# Altium PCB temp.PcbDoc
Units mil, origin at the board's own origin, x right, y up, seen from the top; angles counter-clockwise.
Board outline 6000 x 4000 mil, 2 copper layers (Top Layer, Bottom Layer); 7 components, 0 nets, 592 pads, 0 vias.
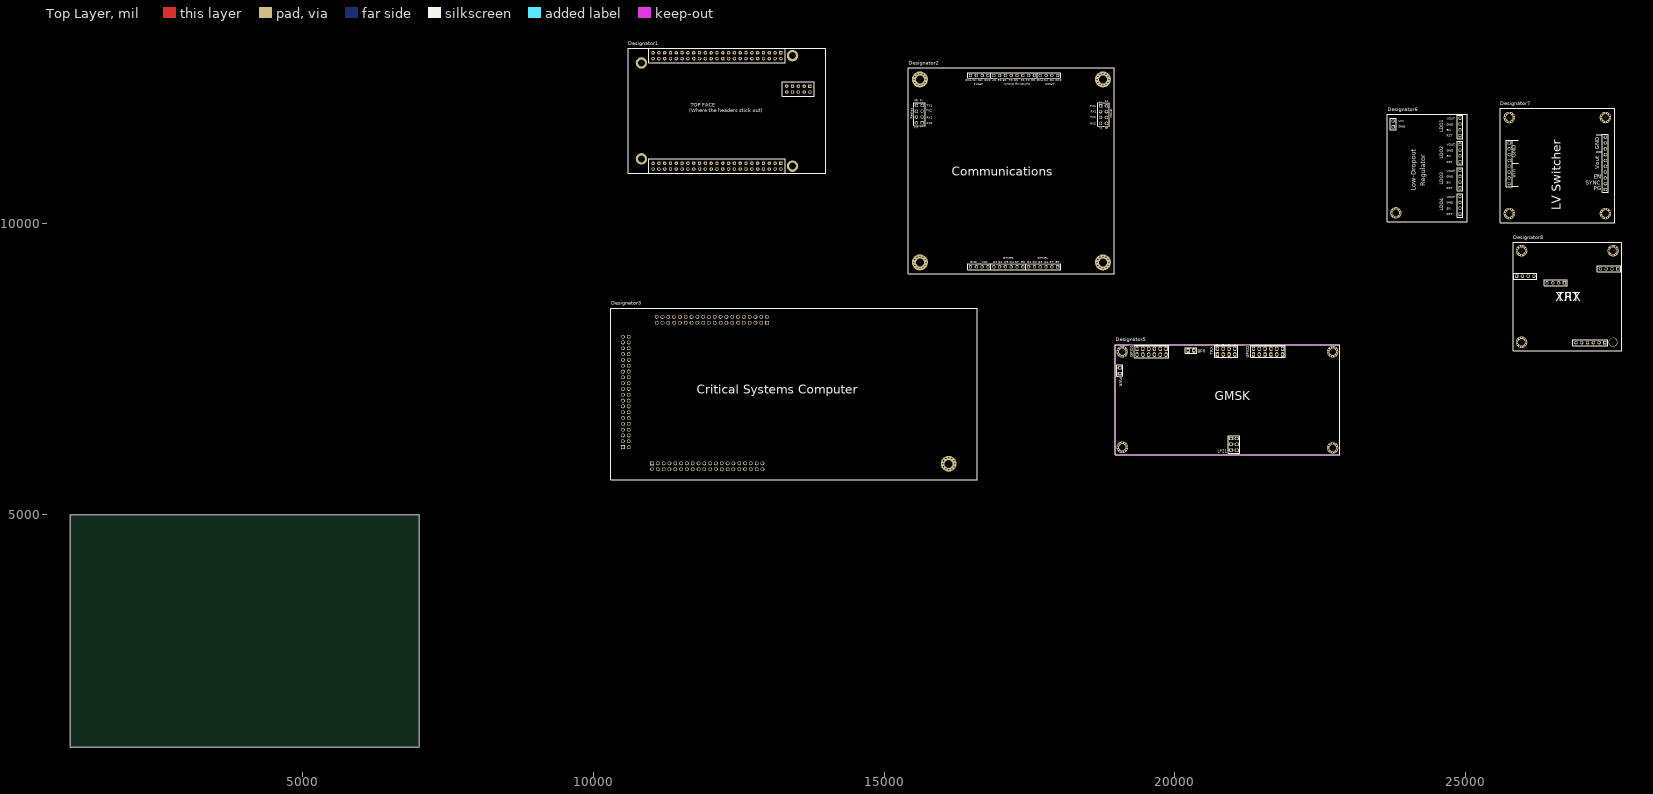
[diagram p0: Top Layer view]
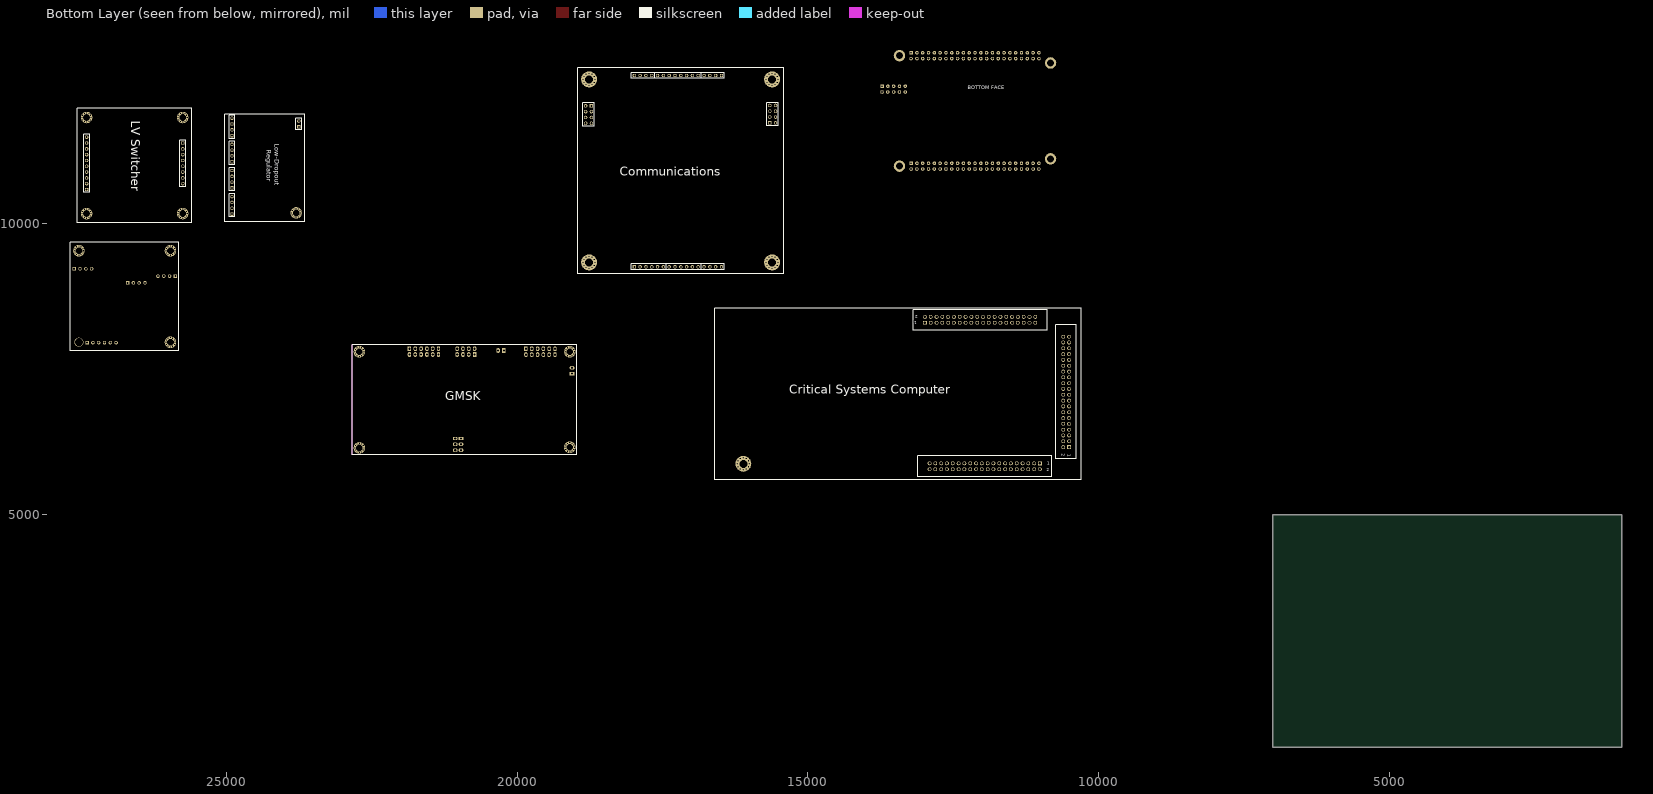
[diagram p1: Bottom Layer view, seen from below]

## Layer stack, top to bottom
Top Layer: signal copper 1.4
Dielectric: dielectric 12.6, FR-4, Dk 4.8
Bottom Layer: signal copper 1.4

## Board outline
1000,1000 7000,1000 7000,5000 1000,5000

## Design rules (kind name [scope] priority, off if disabled: settings)
Clearance [All] p1: gap=10
PolygonConnect [All] p1: connectstyle=Relief reliefconductorwidth=10 reliefentries=4 polygonreliefangle="90 Angle"
RoutingVias [All] p1: holewidth=28 width=50 viastyle="Through Hole" minholewidth=28 minwidth=50 maxholewidth=28 maxwidth=50
SilkscreenOverComponentPads [All] p1: minsilkscreentomaskgap=10
SolderMaskExpansion [All] p1: expansion=4
Width [All] p1: maxlimit=10 minlimit=10 preferedwidth=10
27 further rules are at their usual default settings.

## Components (designator, comment, footprint, x,y, rotation, side; value= is the part's Value field where it differs from the comment)
Designator1 "Comment" Beaglebone 10600,13020 r0 top
Designator2 "Comment" COMMUNICATIONS 15420,9140 r0 top
Designator3 "Comment" CSC 10300,5600 r0 top
Designator5 "Comment" GMSK 18980,6000 r0 top
Designator6 "Comment" LDO 23660,10040 r0 top
Designator7 "Comment" LVSwitcher 25600,10020 r0 top
Designator8 "Comment" TRX_REGULATOR 25840,7840 r0 top

## Footprints (in the part's own frame and the unit in brackets; to place one, negate y for a bottom-side part, rotate by r counter-clockwise, add the part's x,y. Pads: shape width x height; smd on the part's side, far side on the other; paste and mask are expansions set on the pad)
Beaglebone [mil]
  rect 60x60 hole 31.5 mask+2.76: A01(2625,-75) B01(2625,-1975) P01(3125,-650)
  round 60 hole 31.5 mask+2.76: A02(2625,-175) A03(2525,-75) A04(2525,-175) A05(2425,-75) A06(2425,-175) A07(2325,-75) A08(2325,-175) A09(2225,-75) A10(2225,-175) A11(2125,-75) A12(2125,-175) A13(2025,-75) A14(2025,-175) A15(1925,-75) A16(1925,-175) A17(1825,-75) A18(1825,-175) A19(1725,-75) A20(1725,-175) A21(1625,-75) A22(1625,-175) A23(1525,-75) A24(1525,-175) A25(1425,-75) A26(1425,-175) A27(1325,-75) A28(1325,-175) A29(1225,-75) A30(1225,-175) A31(1125,-75) A32(1125,-175) A33(1025,-75) A34(1025,-175) A35(925,-75) A36(925,-175) A37(825,-75) A38(825,-175) A39(725,-75) A40(725,-175) A41(625,-75) A42(625,-175) A43(525,-75) A44(525,-175) A45(425,-75) A46(425,-175) B02(2625,-2075) B03(2525,-1975) B04(2525,-2075) B05(2425,-1975) B06(2425,-2075) B07(2325,-1975) B08(2325,-2075) B09(2225,-1975) B10(2225,-2075) B11(2125,-1975) B12(2125,-2075) B13(2025,-1975) B14(2025,-2075) B15(1925,-1975) B16(1925,-2075) B17(1825,-1975) B18(1825,-2075) B19(1725,-1975) B20(1725,-2075) B21(1625,-1975) B22(1625,-2075) B23(1525,-1975) B24(1525,-2075) B25(1425,-1975) B26(1425,-2075) B27(1325,-1975) B28(1325,-2075) B29(1225,-1975) B30(1225,-2075) B31(1125,-1975) B32(1125,-2075) B33(1025,-1975) B34(1025,-2075) B35(925,-1975) B36(925,-2075) B37(825,-1975) B38(825,-2075) B39(725,-1975) B40(725,-2075) B41(625,-1975) B42(625,-2075) B43(525,-1975) B44(525,-2075) B45(425,-1975) B46(425,-2075) P02(3125,-750) P03(3025,-650) P04(3025,-750) P05(2925,-650) P06(2925,-750) P07(2825,-650) P08(2825,-750) P09(2725,-650) P10(2725,-750)
  round 196.85 hole 122.05 mask+2.76: M1(225,-250) M2(225,-1900) M3(2825,-125) M4(2825,-2025)
  silkscreen extent 0,-2150 3400,0
COMMUNICATIONS [mm] "Communications"
  round 1.5 hole 0.9: AFSK1_M0(32.192,86.733) AFSK1_M1(29.652,86.733) AFSK1_RXD(34.732,86.733) AFSK2_RXD(65.212,86.733) AFSK_M0(62.672,86.733) AFSK_M1(60.132,86.733) AFSK_TXD(57.592,86.733) DTMF1_Q1(52.512,3.113) DTMF1_Q2(55.052,3.113) DTMF1_Q3(57.592,3.113) DTMF1_Q4(60.132,3.113) DTMF1_ST(62.672,3.113) DTMF2_ES(49.972,3.113) DTMF2_Q1(37.272,3.113) DTMF2_Q2(39.812,3.113) DTMF2_Q3(42.352,3.113) DTMF2_Q4(44.892,3.113) DTMF2_ST(47.432,3.113) GMSK_RX1(83.952,70.923) GMSK_RX2(83.952,65.843) GMSK_TX2(83.952,68.383) GND(3.462,66.013) GND(3.462,68.553) GND(3.462,71.093) GND(3.462,73.633) GND(27.112,3.113) GND(29.652,3.113) GND(86.492,65.843) GND(86.492,68.383) GND(86.492,70.923) GND(86.492,73.463) RX1(6.002,68.553) S0(55.052,86.733) S1(52.512,86.733) S2(49.972,86.733) S3(47.432,86.733) S4(44.892,86.733) S5(42.352,86.733) S6(39.812,86.733) S7(37.272,86.733) TX1(6.002,73.633) TX2(6.002,71.093) VCC(32.192,3.113) VCC(34.732,3.113)
  rect 1.5x1.5 hole 0.9: AFSK1_TXD(27.112,86.733) DTMF1_ES(65.212,3.113) GMSK_TX1(83.952,73.463) RX2(6.002,66.013)
  round 1 hole 0.3: GND(2.377,5.013) GND(2.377,85.013) GND(2.729,3.701) GND(2.729,6.325) GND(2.729,83.701) GND(2.729,86.325) GND(3.69,7.286) GND(3.69,87.286) GND(3.69,2.74) GND(3.69,82.74) GND(5.002,2.388) GND(5.002,7.638) GND(5.002,82.388) GND(5.002,87.638) GND(6.314,2.74) GND(6.314,7.286) GND(6.314,82.74) GND(6.314,87.286) GND(7.275,3.701) GND(7.275,83.701) GND(7.275,6.325) GND(7.275,86.325) GND(7.627,5.013) GND(7.627,85.013) GND(82.375,85) GND(82.377,5.013) GND(82.727,83.688) GND(82.727,86.312) GND(82.729,3.701) GND(82.729,6.325) GND(83.688,87.273) GND(83.688,82.727) GND(83.69,7.286) GND(83.69,2.74) GND(85,82.375) GND(85,87.625) GND(85.002,2.388) GND(85.002,7.638) GND(86.312,82.727) GND(86.312,87.273) GND(86.314,2.74) GND(86.314,7.286) GND(87.273,83.688) GND(87.273,86.312) GND(87.275,3.701) GND(87.275,6.325) GND(87.625,85) GND(87.627,5.013)
  round 7 hole 3.5: GND(5.002,5.013) GND(5.002,85.013) GND(85,85) GND(85.002,5.013)
  silkscreen extent 0,0.01 90,90.01
CSC [mm] "Critical Systems Computer"
  rect 1.65x1.65 hole 1.1: C1_1(68.259,68.588) C2_1(5.267,14.232) C3_1(17.967,7.12)
  round 1.65 hole 1.1: C1_2(68.259,71.128) C1_3(65.719,68.588) C1_4(65.719,71.128) C1_5(63.179,68.588) C1_6(63.179,71.128) C1_7(60.639,68.588) C1_8(60.639,71.128) C1_9(58.099,68.588) C1_10(58.099,71.128) C1_11(55.559,68.588) C1_12(55.559,71.128) C1_13(53.019,68.588) C1_14(53.019,71.128) C1_15(50.479,68.588) C1_16(50.479,71.128) C1_17(47.939,68.588) C1_18(47.939,71.128) C1_19(45.399,68.588) C1_20(45.399,71.128) C1_21(42.859,68.588) C1_22(42.859,71.128) C1_23(40.319,68.588) C1_24(40.319,71.128) C1_25(37.779,68.588) C1_26(37.779,71.128) C1_27(35.239,68.588) C1_28(35.239,71.128) C1_29(32.699,68.588) C1_30(32.699,71.128) C1_31(30.159,68.588) C1_32(30.159,71.128) C1_33(27.619,68.588) C1_34(27.619,71.128) C1_35(25.079,68.588) C1_36(25.079,71.128) C1_37(22.539,68.588) C1_38(22.539,71.128) C1_39(19.999,68.588) C1_40(19.999,71.128) C2_2(7.807,14.232) C2_3(5.267,16.772) C2_4(7.807,16.772) C2_5(5.267,19.312) C2_6(7.807,19.312) C2_7(5.267,21.852) C2_8(7.807,21.852) C2_9(5.267,24.392) C2_10(7.807,24.392) C2_11(5.267,26.932) C2_12(7.807,26.932) C2_13(5.267,29.472) C2_14(7.807,29.472) C2_15(5.267,32.012) C2_16(7.807,32.012) C2_17(5.267,34.552) C2_18(7.807,34.552) C2_19(5.267,37.092) C2_20(7.807,37.092) C2_21(5.267,39.632) C2_22(7.807,39.632) C2_23(5.267,42.172) C2_24(7.807,42.172) C2_25(5.267,44.712) C2_26(7.807,44.712) C2_27(5.267,47.252) C2_28(7.807,47.252) C2_29(5.267,49.792) C2_30(7.807,49.792) C2_31(5.267,52.332) C2_32(7.807,52.332) C2_33(5.267,54.872) C2_34(7.807,54.872) C2_35(5.267,57.412) C2_36(7.807,57.412) C2_37(5.267,59.952) C2_38(7.807,59.952) C2_39(5.267,62.492) C2_40(7.807,62.492) C3_2(17.967,4.58) C3_3(20.507,7.12) C3_4(20.507,4.58) C3_5(23.047,7.12) C3_6(23.047,4.58) C3_7(25.587,7.12) C3_8(25.587,4.58) C3_9(28.127,7.12) C3_10(28.127,4.58) C3_11(30.667,7.12) C3_12(30.667,4.58) C3_13(33.207,7.12) C3_14(33.207,4.58) C3_15(35.747,7.12) C3_16(35.747,4.58) C3_17(38.287,7.12) C3_18(38.287,4.58) C3_19(40.827,7.12) C3_20(40.827,4.58) C3_21(43.367,7.12) C3_22(43.367,4.58) C3_23(45.907,7.12) C3_24(45.907,4.58) C3_25(48.447,7.12) C3_26(48.447,4.58) C3_27(50.987,7.12) C3_28(50.987,4.58) C3_29(53.527,7.12) C3_30(53.527,4.58) C3_31(56.067,7.12) C3_32(56.067,4.58) C3_33(58.607,7.12) C3_34(58.607,4.58) C3_35(61.147,7.12) C3_36(61.147,4.58) C3_37(63.687,7.12) C3_38(63.687,4.58) C3_39(66.227,7.12) C3_40(66.227,4.58)
  round 1 hole 0.3: GND(145,6.95) GND(145.352,5.638) GND(145.352,8.262) GND(146.313,9.223) GND(146.313,4.677) GND(147.625,4.325) GND(147.625,9.575) GND(148.937,4.677) GND(148.937,9.223) GND(149.898,5.638) GND(149.898,8.262) GND(150.25,6.95)
  round 7 hole 3.5: GND(147.625,6.95)
  silkscreen extent 0,0 160,75
GMSK [mm] "Foot print of GMSK for the flatsat board"
  rect 1.5x2.1 hole 1: 1A(22.15,47.03) 1B(73.05,47.08) 1C(44.59,44.54) 2C(31.77,46.29)
  rect 2.1x1.5 hole 1: 1C(50.53,7.82) 8C(1.97,36.2)
  oval 1.5x2.1 hole 1: 2A(22.15,44.49) 2B(73.05,44.54) 3A(19.61,47.03) 3B(70.51,47.08) 3C(47.13,44.54) 4A(19.61,44.49) 4B(70.51,44.54) 5A(17.07,47.03) 5B(67.97,47.08) 5C(49.67,44.54) 6A(17.07,44.49) 6B(67.97,44.54) 7A(14.53,47.03) 7B(65.43,47.08) 7C(52.21,44.54) 8A(14.53,44.49) 8B(65.43,44.54) 8C(44.59,47.08) 8C(47.13,47.08) 8C(49.67,47.08) 8C(52.21,47.08) 8C(60.35,47.08) 9A(11.99,47.03) 9B(62.89,47.08) 10A(11.99,44.49) 10B(62.89,44.54) 11A(9.45,47.03) 12A(9.45,44.49) 12C(60.35,44.54) ""(34.31,46.29)
  oval 2.1x1.5 hole 1: 2C(1.97,38.74) 3(50.53,5.28) 3C(50.53,2.74) 4(53.07,5.28) 5C(53.07,2.74) 7C(53.07,7.82)
  round 5 hole 3: 8C(2.97,45.74) 8C(3,4) 8C(94.97,3.74) 8C(94.97,45.74)
  round 1 hole 0.3: GND(0.97,45.74) GND(1,4) GND(1.238,44.74) GND(1.238,46.74) GND(1.268,3) GND(1.268,5) GND(1.97,44.008) GND(1.97,47.472) GND(2,2.268) GND(2,5.732) GND(2.97,43.74) GND(2.97,47.74) GND(3,2) GND(3,6) GND(3.97,44.008) GND(3.97,47.472) GND(4,2.268) GND(4,5.732) GND(4.702,44.74) GND(4.702,46.74) GND(4.732,3) GND(4.732,5) GND(4.97,45.74) GND(5,4) GND(92.97,3.74) GND(92.97,45.74) GND(93.238,2.74) GND(93.238,4.74) GND(93.238,44.74) GND(93.238,46.74) GND(93.97,2.008) GND(93.97,5.472) GND(93.97,44.008) GND(93.97,47.472) GND(94.97,1.74) GND(94.97,5.74) GND(94.97,43.74) GND(94.97,47.74) GND(95.97,2.008) GND(95.97,5.472) GND(95.97,44.008) GND(95.97,47.472) GND(96.702,2.74) GND(96.702,4.74) GND(96.702,44.74) GND(96.702,46.74) GND(96.97,3.74) GND(96.97,45.74)
  Top Layer lines w0.3: 50.03,2.24 50.53,2.74
  Keep-Out Layer lines w0.254: -0.03,0.74 -0.03,48.74 97.97,48.74 97.97,0.74 -0.03,0.74
  silkscreen extent -0.03,0.74 97.97,48.94, body extent 0.8,1.57 74.23,48.26, height 7.01
LDO [mm] "Low-dropout Regulator"
  round 1.5 hole 0.9: EN1(31.75,40.132) EN2(31.75,28.702) EN3(31.75,17.272) EN4(31.75,5.842) GND(31.75,8.382) GND(31.75,19.812) GND(31.75,31.242) GND(31.75,42.672) VIN(2.54,43.942) VOUT1(31.75,45.212) VOUT2(31.75,33.782) VOUT3(31.75,22.352) VOUT4(31.75,10.922)
  round 1 hole 0.3: GND(1.683,3.81) GND(1.951,2.81) GND(1.951,4.81) GND(2.683,2.078) GND(2.683,5.542) GND(3.683,1.81) GND(3.683,5.81) GND(4.683,2.078) GND(4.683,5.542) GND(5.415,2.81) GND(5.415,4.81) GND(5.683,3.81)
  rect 1.5x1.5 hole 0.9: GND(2.54,41.402) RESET1(31.75,37.592) RESET2(31.75,26.162) RESET3(31.75,14.732) RESET4(31.75,3.302)
  round 5 hole 3: GND(3.683,3.81)
  silkscreen extent 0,0 34.9,46.9
LVSwitcher [mm] "Low-Voltage Switching Regulator"
  round 1.5 hole 0.9: EN(46,19.615) GND(3.975,27.235) GND(3.975,29.775) GND(3.975,32.315) GND(46,32.315) GND(46,34.855) GND(46,37.395) SYNC(46,17.075) Vin(3.975,17.075) Vin(3.975,19.615) Vin(3.975,22.155) Vin(3.975,24.695) Vout(46,22.155) Vout(46,24.695) Vout(46,27.235) Vout(46,29.775)
  round 1 hole 0.3: GND(2,4) GND(2,46) GND(2.268,3) GND(2.268,5) GND(2.268,45) GND(2.268,47) GND(3,2.268) GND(3,5.732) GND(3,44.268) GND(3,47.732) GND(4,2) GND(4,6) GND(4,44) GND(4,48) GND(5,2.268) GND(5,5.732) GND(5,44.268) GND(5,47.732) GND(5.732,3) GND(5.732,5) GND(5.732,45) GND(5.732,47) GND(6,4) GND(6,46) GND(44,4) GND(44,46) GND(44.268,3) GND(44.268,5) GND(44.268,45) GND(44.268,47) GND(45,2.268) GND(45,5.732) GND(45,44.268) GND(45,47.732) GND(46,2) GND(46,6) GND(46,44) GND(46,48) GND(47,2.268) GND(47,5.732) GND(47,44.268) GND(47,47.732) GND(47.732,3) GND(47.732,5) GND(47.732,45) GND(47.732,47) GND(48,4) GND(48,46)
  rect 1.5x1.5 hole 0.9: GND(3.975,34.855) PG(46,14.535)
  round 5 hole 3: GND(4,4) GND(4,46) GND(46,4) GND(46,46)
  silkscreen extent 0,0 50,50
TRX_REGULATOR [mm]
  round 1.5 hole 0.9: 1(27.018,2.962) 1(29.558,2.962) 1(32.098,2.962) 2(3.65,32.045) 2(34.638,2.962) 2(37.178,2.962) 2(42.791,35.27) 3(19.474,29.149) 4(16.934,29.149) 5(37.711,35.27) 5(40.251,35.27) 6(6.19,32.045) 6(8.73,32.045) 7(14.394,29.149)
  rect 1.5x1.5 hole 0.9: 2(1.11,32.045) 2(22.014,29.149) 2(39.718,2.962) 2(45.331,35.27)
  round 4 hole 3.5: 4(43.291,3.161)
  round 5 hole 3: 8C(3.291,3.161) 8C(3.291,43.161) 8C(43.291,43.161)
  round 1 hole 0.3: GND(1.291,3.161) GND(1.291,43.161) GND(1.559,2.161) GND(1.559,4.161) GND(1.559,42.161) GND(1.559,44.161) GND(2.291,1.429) GND(2.291,4.893) GND(2.291,41.429) GND(2.291,44.893) GND(3.291,1.161) GND(3.291,5.161) GND(3.291,41.161) GND(3.291,45.161) GND(4.291,1.429) GND(4.291,4.893) GND(4.291,41.429) GND(4.291,44.893) GND(5.023,2.161) GND(5.023,4.161) GND(5.023,42.161) GND(5.023,44.161) GND(5.291,3.161) GND(5.291,43.161) GND(41.291,43.161) GND(41.559,42.161) GND(41.559,44.161) GND(42.291,41.429) GND(42.291,44.893) GND(43.291,41.161) GND(43.291,45.161) GND(44.291,41.429) GND(44.291,44.893) GND(45.023,42.161) GND(45.023,44.161) GND(45.291,43.161)
  silkscreen extent -0.41,-0.54 46.98,46.86

## Nets (pads, with @x,y where several pads share a name; then routed paths per layer and width w, separated by ;. In a path a pad name is that pad's centre, name@x,y a point inside that pad or via, vN(x,y) a via of type N, cw(c..) or ccw(c..) an arc to the next point about the centre after c; other vN are vias at no path point)
pads on no net: Designator1.A01 Designator1.A02 Designator1.A03 Designator1.A04 Designator1.A05 Designator1.A06 Designator1.A07 Designator1.A08 Designator1.A09 Designator1.A10 Designator1.A11 Designator1.A12 Designator1.A13 Designator1.A14 Designator1.A15 Designator1.A16 Designator1.A17 Designator1.A18 Designator1.A19 Designator1.A20 Designator1.A21 Designator1.A22 Designator1.A23 Designator1.A24 Designator1.A25 Designator1.A26 Designator1.A27 Designator1.A28 Designator1.A29 Designator1.A30 Designator1.A31 Designator1.A32 Designator1.A33 Designator1.A34 Designator1.A35 Designator1.A36 Designator1.A37 Designator1.A38 Designator1.A39 Designator1.A40 Designator1.A41 Designator1.A42 Designator1.A43 Designator1.A44 Designator1.A45 Designator1.A46 Designator1.B01 Designator1.B02 Designator1.B03 Designator1.B04 Designator1.B05 Designator1.B06 Designator1.B07 Designator1.B08 Designator1.B09 Designator1.B10 Designator1.B11 Designator1.B12 Designator1.B13 Designator1.B14 Designator1.B15 Designator1.B16 Designator1.B17 Designator1.B18 Designator1.B19 Designator1.B20 Designator1.B21 Designator1.B22 Designator1.B23 Designator1.B24 Designator1.B25 Designator1.B26 Designator1.B27 Designator1.B28 Designator1.B29 Designator1.B30 Designator1.B31 Designator1.B32 Designator1.B33 Designator1.B34 Designator1.B35 Designator1.B36 Designator1.B37 Designator1.B38 Designator1.B39 Designator1.B40 Designator1.B41 Designator1.B42 Designator1.B43 Designator1.B44 Designator1.B45 Designator1.B46 Designator1.M1 Designator1.M2 Designator1.M3 Designator1.M4 Designator1.P01 Designator1.P02 Designator1.P03 Designator1.P04 Designator1.P05 Designator1.P06 Designator1.P07 Designator1.P08 Designator1.P09 Designator1.P10 Designator2.AFSK1_M0 Designator2.AFSK1_M1 Designator2.AFSK1_RXD Designator2.AFSK1_TXD Designator2.AFSK2_RXD Designator2.AFSK_M0 Designator2.AFSK_M1 Designator2.AFSK_TXD Designator2.DTMF1_ES Designator2.DTMF1_Q1 Designator2.DTMF1_Q2 Designator2.DTMF1_Q3 Designator2.DTMF1_Q4 Designator2.DTMF1_ST Designator2.DTMF2_ES Designator2.DTMF2_Q1 Designator2.DTMF2_Q2 Designator2.DTMF2_Q3 Designator2.DTMF2_Q4 Designator2.DTMF2_ST Designator2.GMSK_RX1 Designator2.GMSK_RX2 Designator2.GMSK_TX1 Designator2.GMSK_TX2 Designator2.GND Designator2.RX1 Designator2.RX2 Designator2.S0 Designator2.S1 Designator2.S2 Designator2.S3 Designator2.S4 Designator2.S5 Designator2.S6 Designator2.S7 Designator2.TX1 Designator2.TX2 Designator2.VCC Designator3.C1_1 Designator3.C1_2 Designator3.C1_3 Designator3.C1_4 Designator3.C1_5 Designator3.C1_6 Designator3.C1_7 Designator3.C1_8 Designator3.C1_9 Designator3.C1_10 Designator3.C1_11 Designator3.C1_12 Designator3.C1_13 Designator3.C1_14 Designator3.C1_15 Designator3.C1_16 Designator3.C1_17 Designator3.C1_18 Designator3.C1_19 Designator3.C1_20 Designator3.C1_21 Designator3.C1_22 Designator3.C1_23 Designator3.C1_24 Designator3.C1_25 Designator3.C1_26 Designator3.C1_27 Designator3.C1_28 Designator3.C1_29 Designator3.C1_30 Designator3.C1_31 Designator3.C1_32 Designator3.C1_33 Designator3.C1_34 Designator3.C1_35 Designator3.C1_36 Designator3.C1_37 Designator3.C1_38 Designator3.C1_39 Designator3.C1_40 Designator3.C2_1 Designator3.C2_2 Designator3.C2_3 Designator3.C2_4 Designator3.C2_5 Designator3.C2_6 Designator3.C2_7 Designator3.C2_8 Designator3.C2_9 Designator3.C2_10 Designator3.C2_11 Designator3.C2_12 Designator3.C2_13 Designator3.C2_14 Designator3.C2_15 Designator3.C2_16 Designator3.C2_17 Designator3.C2_18 Designator3.C2_19 Designator3.C2_20 Designator3.C2_21 Designator3.C2_22 Designator3.C2_23 Designator3.C2_24 Designator3.C2_25 Designator3.C2_26 Designator3.C2_27 Designator3.C2_28 Designator3.C2_29 Designator3.C2_30 Designator3.C2_31 Designator3.C2_32 Designator3.C2_33 Designator3.C2_34 Designator3.C2_35 Designator3.C2_36 Designator3.C2_37 Designator3.C2_38 Designator3.C2_39 Designator3.C2_40 Designator3.C3_1 Designator3.C3_2 Designator3.C3_3 Designator3.C3_4 Designator3.C3_5 Designator3.C3_6 Designator3.C3_7 Designator3.C3_8 Designator3.C3_9 Designator3.C3_10 Designator3.C3_11 Designator3.C3_12 Designator3.C3_13 Designator3.C3_14 Designator3.C3_15 Designator3.C3_16 Designator3.C3_17 Designator3.C3_18 Designator3.C3_19 Designator3.C3_20 Designator3.C3_21 Designator3.C3_22 Designator3.C3_23 Designator3.C3_24 Designator3.C3_25 Designator3.C3_26 Designator3.C3_27 Designator3.C3_28 Designator3.C3_29 Designator3.C3_30 Designator3.C3_31 Designator3.C3_32 Designator3.C3_33 Designator3.C3_34 Designator3.C3_35 Designator3.C3_36 Designator3.C3_37 Designator3.C3_38 Designator3.C3_39 Designator3.C3_40 Designator3.GND Designator5. Designator5.1A Designator5.1B Designator5.1C Designator5.2A Designator5.2B Designator5.2C Designator5.3 Designator5.3A Designator5.3B Designator5.3C Designator5.4 Designator5.4A Designator5.4B Designator5.5A Designator5.5B Designator5.5C Designator5.6A Designator5.6B Designator5.7A Designator5.7B Designator5.7C Designator5.8A Designator5.8B Designator5.8C Designator5.9A Designator5.9B Designator5.10A Designator5.10B Designator5.11A Designator5.12A Designator5.12C Designator5.GND Designator6.EN1 Designator6.EN2 Designator6.EN3 Designator6.EN4 Designator6.GND Designator6.RESET1 Designator6.RESET2 Designator6.RESET3 Designator6.RESET4 Designator6.VIN Designator6.VOUT1 Designator6.VOUT2 Designator6.VOUT3 Designator6.VOUT4 Designator7.EN Designator7.GND Designator7.PG Designator7.SYNC Designator7.Vin Designator7.Vout Designator8.1 Designator8.2 Designator8.3 Designator8.4 Designator8.5 Designator8.6 Designator8.7 Designator8.8C Designator8.GND

## Text inside footprints (layer, text, board x,y; h text height)
Designator1: Top Overlay "TOP FACE" at 11675,12020 h60; Top Overlay "(Where the headers stick out)" at 11650,11920 h60; Bottom Overlay "BOTTOM FACE" at 12250,12320 h60
Designator2: Top Overlay "Communications" at 16168.03,10832.91 h150; Top Overlay "2" at 18805.2,12132.26 h50 r270; Top Overlay "1" at 18705.2,12112.26 h50 r270; Top Overlay "7" at 18705.2,11672.26 h50 r270; Top Overlay "8" at 18805.2,11672.26 h50 r270; Top Overlay "2" at 15576.3,11638.94 h50 r90; Top Overlay "1" at 15676.3,11658.94 h50 r90; Top Overlay "7" at 15676.3,12098.94 h50 r90; Top Overlay "8" at 15576.3,12098.94 h50 r90; Top Overlay "Switching Circuit" at 17516.54,12418.07 h39.37 r180; Top Overlay "S1" at 17506.69,12486.97 h39.37 r180; Top Overlay "S0" at 17605.12,12486.97 h39.37 r180; Top Overlay "TXD" at 17742.91,12486.97 h39.37 r180; Top Overlay "M0" at 17929.92,12486.97 h39.37 r180; Top Overlay "M1" at 17821.65,12486.97 h39.37 r180; Top Overlay "RXD" at 18057.87,12486.97 h39.37 r180; Top Overlay "AFSK2" at 17939.76,12418.07 h39.37 r180; Top Overlay "Q1" at 17467.32,9327.52 h39.37; Top Overlay "DTMF1" at 17644.49,9396.42 h39.37; Top Overlay "Q2" at 17555.91,9327.52 h39.37; Top Overlay "Q3" at 17654.33,9327.52 h39.37; Top Overlay "Q4" at 17752.76,9327.52 h39.37; Top Overlay "ST" at 17851.18,9327.52 h39.37; Top Overlay "ES" at 17949.61,9327.52 h39.37; Top Overlay "ES" at 17359.06,9327.52 h39.37; Top Overlay "ST" at 17260.63,9327.52 h39.37; Top Overlay "Q4" at 17162.2,9327.52 h39.37; Top Overlay "Q3" at 17063.78,9327.52 h39.37; Top Overlay "Q2" at 16965.35,9327.52 h39.37; Top Overlay "DTMF2" at 17053.94,9396.42 h39.37; Top Overlay "Q1" at 16876.77,9327.52 h39.37; Top Overlay "VCC" at 16679.92,9327.52 h39.37; Top Overlay "GND" at 16483.07,9327.52 h39.37; Top Overlay "S7" at 16925.98,12486.97 h39.37 r180; Top Overlay "S6" at 17024.41,12486.97 h39.37 r180; Top Overlay "S5" at 17112.99,12486.97 h39.37 r180; Top Overlay "S4" at 17211.42,12486.97 h39.37 r180; Top Overlay "S3" at 17309.84,12486.97 h39.37 r180; Top Overlay "S2" at 17418.11,12486.97 h39.37 r180; Top Overlay "AFSK1" at 16709.45,12418.07 h39.37 r180; Top Overlay "RXD" at 16837.4,12486.97 h39.37 r180; Top Overlay "M1" at 16591.34,12486.97 h39.37 r180; Top Overlay "M0" at 16699.61,12486.97 h39.37 r180; Top Overlay "TXD" at 16512.6,12486.97 h39.37 r180; Top Overlay "RX2" at 18550,11709.41 h39.37; Top Overlay "TX2" at 18550,11817.68 h39.37; Top Overlay "RX1" at 18559.84,11916.1 h39.37; Top Overlay "TX1" at 18550,12004.68 h39.37; Top Overlay "GMSK" at 18894.49,11975.16 h39.37 r270; Top Overlay "TX1" at 15731.1,12018.46 h39.37; Top Overlay "TX2" at 15727.17,11927.91 h39.37; Top Overlay "Radios" at 15488.98,11807.83 h39.37 r90; Top Overlay "RX2" at 15731.1,11711.38 h39.37; Top Overlay "RX1" at 15735.04,11805.87 h39.37; Bottom Overlay "Communications" at 18234.96,10832.91 h150
Designator3: Top Overlay "Critical Systems Computer" at 11776.38,7076.38 h150; Bottom Overlay "Critical Systems Computer" at 15319.68,7076.38 h150; Bottom Overlay "1" at 10880.71,5855.91 h50; Bottom Overlay "2" at 10890.55,5747.64 h50; Bottom Overlay "1" at 13124.8,8325.39 h50 r180; Bottom Overlay "2" at 13111.02,8429.72 h50 r180; Bottom Overlay "2" at 10634.65,6042.91 h50 r90; Bottom Overlay "1" at 10526.38,6033.07 h50 r90
Designator5: Top Overlay "GMSK" at 20692.6,6964.57 h150; Top Overlay "GPIO1" at 19283.15,7705.71 h47.24 r90; Top Overlay "LP21" at 20743.58,6062.6 h47.24; Top Overlay "BFR" at 20398.31,7780.51 h47.24; Top Overlay "TRX" at 20667.01,7748.03 h47.24 r90; Top Overlay "GPIO2" at 21286.1,7693.9 h47.24 r90; Top Overlay "PWR" at 19043.98,7360.24 h47.24 r270; Bottom Overlay "GMSK" at 21243.78,6964.57 h150
Designator6: Top Overlay "VIN" at 23856.85,11752.6 h39.37; Top Overlay "GND" at 23856.85,11654.17 h39.37; Top Overlay "VOUT" at 24683.62,11791.97 h39.37; Top Overlay "GND" at 24683.62,11693.54 h39.37; Top Overlay "EN" at 24683.62,11595.12 h39.37; Top Overlay "RST" at 24683.62,11496.69 h39.37; Top Overlay "LDO1" at 24624.57,11575.43 h59.06 r90; Top Overlay "LDO2" at 24624.57,11125.43 h59.06 r90; Top Overlay "RST" at 24683.62,11046.69 h39.37; Top Overlay "EN" at 24683.62,11145.12 h39.37; Top Overlay "GND" at 24683.62,11243.54 h39.37; Top Overlay "VOUT" at 24683.62,11341.97 h39.37; Top Overlay "LDO3" at 24624.57,10675.43 h59.06 r90; Top Overlay "RST" at 24683.62,10596.69 h39.37; Top Overlay "EN" at 24683.62,10695.12 h39.37; Top Overlay "GND" at 24683.62,10793.54 h39.37; Top Overlay "VOUT" at 24683.62,10891.97 h39.37; Top Overlay "LDO4" at 24624.57,10225.43 h59.06 r90; Top Overlay "RST" at 24683.62,10146.69 h39.37; Top Overlay "EN" at 24683.62,10245.12 h39.37; Top Overlay "GND" at 24683.62,10343.54 h39.37; Top Overlay "VOUT" at 24683.62,10441.97 h39.37; Top Overlay "Low-Dropout" at 24152.13,10571.5 h78.74 r90; Top Overlay "Regulator" at 24309.61,10650.24 h78.74 r90; Bottom Overlay "Regulator" at 24309.61,11280.16 h78.74 r90; Bottom Overlay "Low-Dropout" at 24171.81,11378.58 h78.74 r90
Designator7: Top Overlay "LV Switcher" at 26643.31,10236.54 h150 r90; Top Overlay "GND" at 25895.28,11142.05 h118.11 r90; Top Overlay "Vin" at 25895.28,10787.72 h118.11 r90; Top Overlay "GND" at 27332.28,11279.84 h118.11 r90; Top Overlay "Vout" at 27332.28,10945.2 h118.11 r90; Top Overlay "PG" at 27214.17,10551.5 h118.11; Top Overlay "SYNC" at 27076.38,10649.92 h118.11; Top Overlay "EN" at 27214.17,10748.35 h118.11; Bottom Overlay "LV Switcher" at 26643.31,11771.97 h150 r90
Designator8: Top Overlay "TRX" at 26969.75,8666.77 h150; Top Overlay "TRX" at 26572.5,8671.1 h150